# Altium PCB LoRaStm32.PcbDoc
Units mm, origin at the board's own origin, x right, y up, seen from the top; angles counter-clockwise.
Board outline 152.4 x 101.6 mm, 2 copper layers (Top Layer, Bottom Layer); 27 components, 29 nets, 134 pads, 19 vias.
Unrouted connection lines stored in the file: 31.
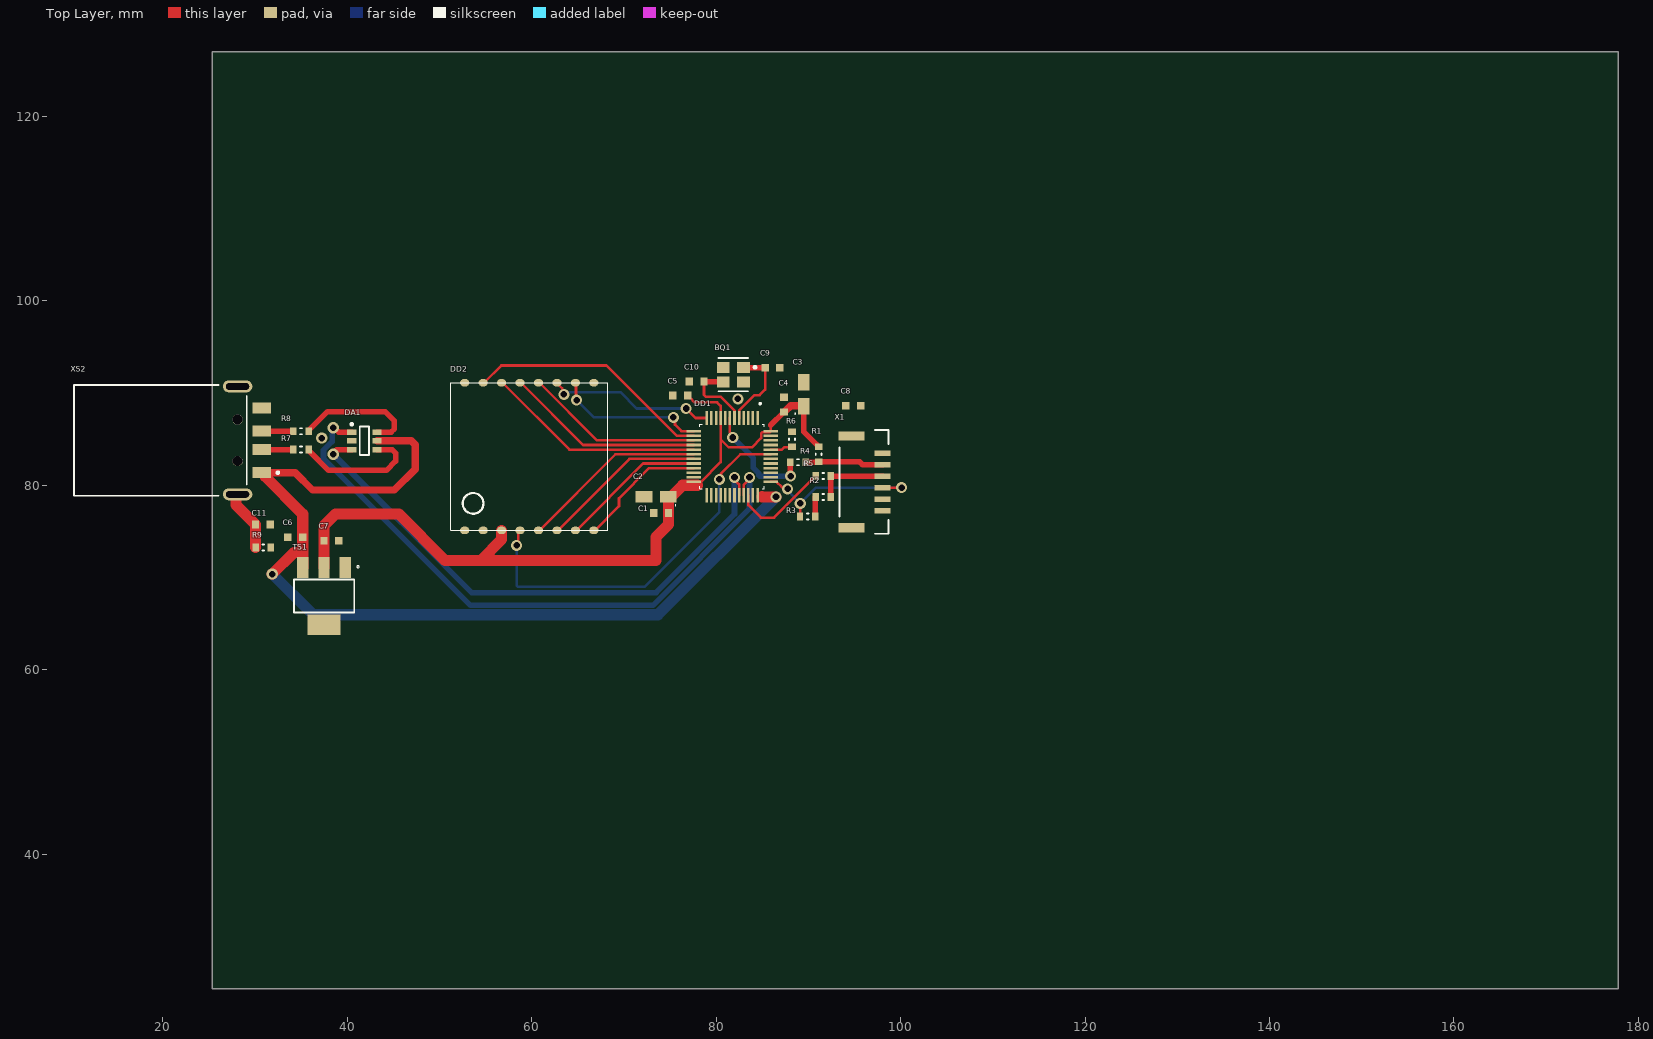
[diagram p0: Top Layer view]
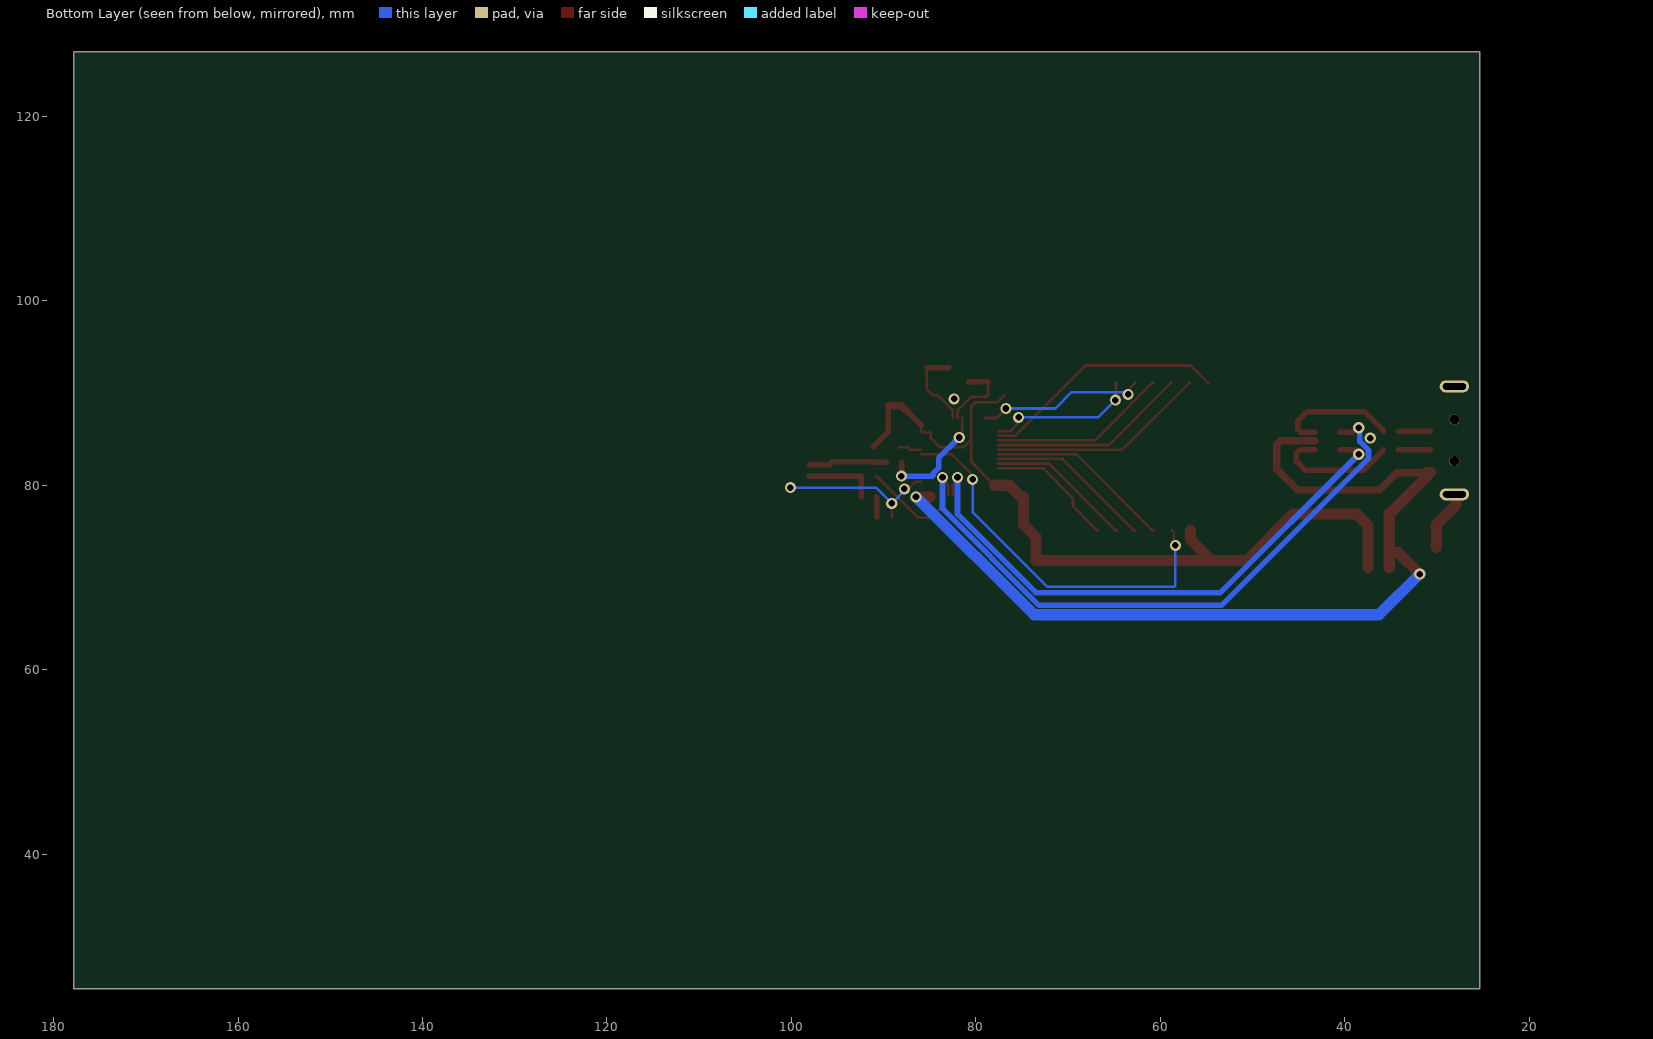
[diagram p1: Bottom Layer view, seen from below]
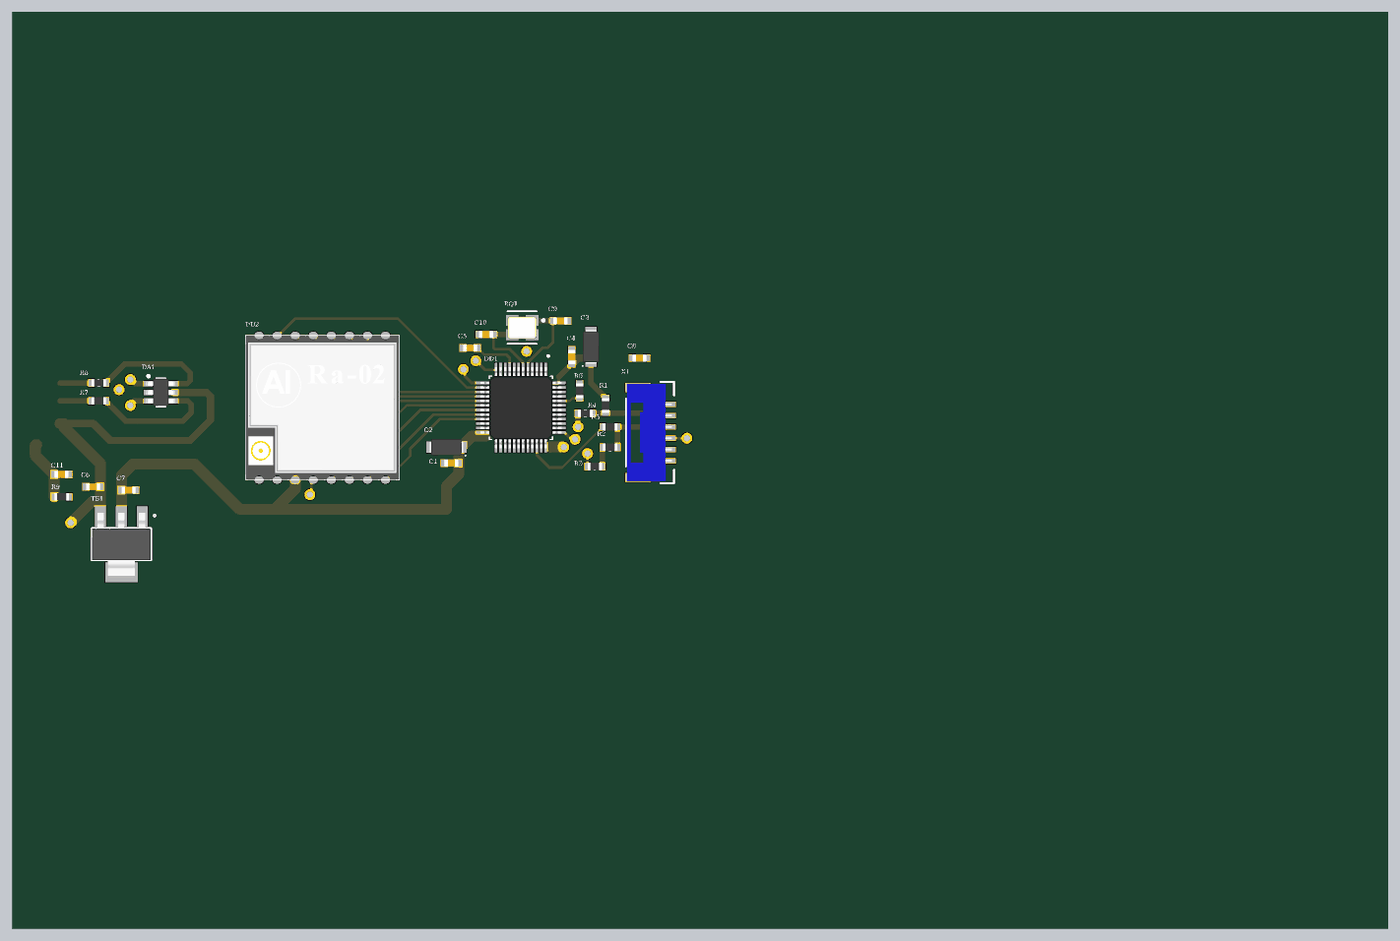
[diagram p2: 3D render of the assembled board from above, using the file's embedded part models]

## Layer stack, top to bottom
Top Solder: solder mask 0.0102, Solder Resist, Dk 3.5
Top Layer: signal copper 0.0356
Dielectric 1: dielectric 0.32, FR-4, Dk 4.8
Bottom Layer: signal copper 0.0356
Bottom Solder: solder mask 0.0102, Solder Resist, Dk 3.5

## Board outline
25.4,25.4 177.8,25.4 177.8,127 25.4,127

## Design rules (kind name [scope] priority, off if disabled: settings)
Clearance [All] p1: gap=0.125 ignorepadtopadclearanceinfootprint=FALSE
PolygonConnect [All] p1: connectstyle=Relief reliefconductorwidth=0.254 reliefentries=4 polygonreliefangle="90 Angle" airgapwidth=0.254
RoutingCorners [All] p1: cornerstyle=45-Degree minsetback=3 maxsetback=3
RoutingVias [All] p1: holewidth=0.3 width=0.7 viastyle="Through Hole" minholewidth=0.3 minwidth=0.6 maxholewidth=0.6 maxwidth=1.2
SolderMaskExpansion [All] p1: expansion=0.102
Width [All] p1: maxlimit=10 minlimit=0.125 preferedwidth=0.6
29 further rules are at their usual default settings.

## Components (designator, comment, footprint, x,y, rotation, side; value= is the part's Value field where it differs from the comment)
BQ1 "NX3225GA" NDK_NX3225GA_0 81.875,92 r180 top
C1 "*" CAPC1608X09L 74.046,77 r180 top
C2 "*" CAPMP3216X16N-A 73.5,78.75 r180 top value=1uF
C3 "*" CAPMP3216X16N-A 89.5,89.875 r90 top value=10uF
C4 "*" CAPC1608X09L 87.375,88.75 r90 top
C5 "*" CAPC1608X09L 76.125,89.75 r180 top
C6 "*" CAPC1608X09L 34.375,74.375 r180 top
C7 "*" CAPC1608X09L 38.3,74 r180 top
C8 "*" CAPC1608X09L 94.875,88.625 r0 top
C9 "*" CAPC1608X09L 86.125,92.75 r180 top
C10 "*" CAPC1608X09L 77.895,91.25 r0 top
C11 "*" CAPC1608X09L 30.875,75.75 r180 top value=4.7n
DA1 "USBLC6-2SC6" SOT95P280X145-6N 41.875,84.825 r0 top
DD1 "STM32L073CZT6" *QFP50P900X900X160-48N 81.75,83.125 r270 top
DD2 "RA-02 SX1278" RA-02 51.25,75.125 r90 top
R1 "R1608" RESC1608X05N 91.125,83.375 r270 top value=10k
R2 "R1608" RESC1608X05N 91.625,78.75 r0 top value=10k
R3 "R1608" RESC1608X05N 89.925,76.625 r180 top value=10k
R4 "R1608" RESC1608X05N 88.875,82.5 r0 top value=22
R5 "R1608" RESC1608X05N 91.625,81 r0 top value=22
R6 "R1608" RESC1608X05N 88.25,85 r270 top value=22
R7 "R1608" RESC1608X05N 35,83.875 r180 top value=22
R8 "R1608" RESC1608X05N 35,85.875 r180 top value=22
R9 "R1608" RESC1608X05N 30.9,73.25 r180 top value=22
TS1 "LD1117S33CTR" *SOT223 37.5,68 r270 top
X1 "BM06B-GHS-TBT(LF)(SN)(N)" BM06B-GH 96.375,80.375 r270 top
XS2 "Conn_Molex_0480372200_eec" Molex_0480372200_0 19.75,84.875 r270 top

## Footprints (in the part's own frame and the unit in brackets; to place one, negate y for a bottom-side part, rotate by r counter-clockwise, add the part's x,y. Pads: shape width x height; smd on the part's side, far side on the other; paste and mask are expansions set on the pad)
*QFP50P900X900X160-48N [mm]
  rect 1.56x0.28 smd: 1(-4.18,2.75) 2(-4.18,2.25) 3(-4.18,1.75) 4(-4.18,1.25) 5(-4.18,0.75) 6(-4.18,0.25) 7(-4.18,-0.25) 8(-4.18,-0.75) 9(-4.18,-1.25) 10(-4.18,-1.75) 11(-4.18,-2.25) 12(-4.18,-2.75) 25(4.18,-2.75) 26(4.18,-2.25) 27(4.18,-1.75) 28(4.18,-1.25) 29(4.18,-0.75) 30(4.18,-0.25) 31(4.18,0.25) 32(4.18,0.75) 33(4.18,1.25) 34(4.18,1.75) 35(4.18,2.25) 36(4.18,2.75)
  rect 0.28x1.56 smd: 13(-2.75,-4.18) 14(-2.25,-4.18) 15(-1.75,-4.18) 16(-1.25,-4.18) 17(-0.75,-4.18) 18(-0.25,-4.18) 19(0.25,-4.18) 20(0.75,-4.18) 21(1.25,-4.18) 22(1.75,-4.18) 23(2.25,-4.18) 24(2.75,-4.18) 37(2.75,4.18) 38(2.25,4.18) 39(1.75,4.18) 40(1.25,4.18) 41(0.75,4.18) 42(0.25,4.18) 43(-0.25,4.18) 44(-0.75,4.18) 45(-1.25,4.18) 46(-1.75,4.18) 47(-2.25,4.18) 48(-2.75,4.18)
  silkscreen extent -5.84,-3.5 3.5,3.5, body extent -4.5,-4.5 4.5,4.5, height 1.6
*SOT223 [mil]
  rect 88x48 smd: 1(-122,91) 2(-122,0) 3(-122,-91)
  rect 86.61x141.73 smd: 4(122.01,0)
  silkscreen extent -130,-129 70,150, body extent -138,-128 138,128, height 67
BM06B-GH [mm]
  rect 1x2.8 smd paste-0.05: 0(-4.975,-1.675) 0(4.975,-1.675)
  rect 0.6x1.7 smd paste-0.05: 1(-3.125,1.675) 2(-1.875,1.675) 3(-0.625,1.675) 4(0.625,1.675) 5(1.875,1.675) 6(3.125,1.675)
  silkscreen extent -5.63,-3 5.63,2.32, body extent -5.38,-2.87 5.37,2.08, height 4.18
CAPC1608X09L [mm] "Chip Capacitor, 2-Leads, Body 1.60x0.80mm, IPC High Density"
  rect 0.8x0.85 smd paste-0.05 mask+0.07: 1(-0.8,0) 2(0.8,0)
  body extent -0.8,-0.4 0.8,0.4, height 0.9
CAPMP3216X16N-A [mm] "Molded Capacitor, 2-Leads, Body 3.20x1.60mm, IPC Medium Density"
  rect 1.8x1.23 smd: 1(-1.31,0) 2(1.31,0)
  silkscreen extent -2.15,0.88 -2.05,0.97, body extent -1.92,-0.9 1.92,0.9, height 1.6
Molex_0480372200_0 [mm]
  rect 1.2x2 smd paste+0 mask+0: 1(3.5,10.975) 2(1,10.975) 3(-1,10.975) 4(-3.5,10.975)
  oval 1.3x3.2 hole 2.5 slot 0.7 at 0 deg paste-1000 mask+0: 5(-5.85,8.375) 6(5.85,8.375)
  round 1.1 hole 1.1 unplated paste-1000 mask+0: ""(-2.25,8.375) ""(2.25,8.375)
  silkscreen extent -6,-9.38 6,12.88, body extent -6.02,-9.32 6.03,11.63, height 2.11
NDK_NX3225GA_0 [mm]
  rect 1.4x1.2 smd paste+0 mask+0: 1(-1.1,-0.8) 2(1.1,-0.8) 3(1.1,0.8) 4(-1.1,0.8)
  silkscreen extent -2.48,-1.8 1.6,1.8, body extent -1.6,-1.25 1.6,1.25, height 0.6
RA-02 [mm]
  oval 0.8x1 smd: 1(0,-1.5) 2(0,-3.5) 3(0,-5.5) 4(0,-7.493) 5(0,-9.5) 6(0,-11.5) 7(0,-13.5) 8(0,-15.5) 9(16,-15.5) 10(16,-13.5) 11(16,-11.5) 12(16,-9.5) 13(16,-7.5) 14(16,-5.5) 15(16,-3.5) 16(16,-1.5)
  silkscreen extent 0,-17.02 16,0, body extent 0,-17.01 16,-0.01, height 3.2
RESC1608X05N [mm] "Chip Resistor, 2-Leads, Body 1.60x0.80mm, IPC Medium Density"
  rect 0.7x0.85 smd paste-0.05: 1(-0.825,0) 2(0.825,0)
  silkscreen extent -0.1,-0.33 0.1,0.33, body extent -0.8,-0.4 0.8,0.4, height 0.45
SOT95P280X145-6N [mm] "SOT23, 6-Leads, Body 2.92x2.80mm, Pitch 0.95mm, IPC Medium Density"
  rect 1x0.6 smd: 1(-1.375,0.95) 2(-1.375,0) 3(-1.375,-0.95) 4(1.375,-0.95) 5(1.375,0) 6(1.375,0.95)
  silkscreen extent -1.5,-1.55 0.5,1.92, body extent -1.6,-1.53 1.6,1.53, height 1.45

## Part data
BQ1: library part NX3225GA-25MHZ, "NX3225GA-25MHZ 8pF, 25 МГц, 30/20ppm, 8пФ, -40...+85°C, SMD 3.2*2.5*0.75мм, Кварцевый резонатор", Package="SMD-4 NDK America, Inc.", Availability=Unavailable, ComponentLink1Description=buy, ComponentLink1URL=https://www.chipdip.ru/product0/9000523947, ComponentLink2Description=datasheet, ComponentLink2URL=https://static.chipdip.ru/lib/014/DOC004014815.pdf, MF="NDK America, Inc.", MP="NX3225GA-25MHZ 8pF", Price=None, SnapEDA_Link=https://www.snapeda.com/parts/NX2520SA-24.000000MHZ-B8/NDK%20America%2C%20Inc./view-part/?ref=snap
C1 C4 C5 C6 C7 C8 C9 C10 C11: library part CC1608, "Конденсатор 1.6x0.8 мм", Tolerance=±10%, ТКЕ=X7R
  C1 C4 C5 C8: GRM21BR71C105KA01L=100nF, РКД Наименование="CC1608M - NP0 - 16 V - 10 nF ±10%"
  C6: GRM21BR71C105KA01L=100n, РКД Наименование="CC1608M - NP0 - 16 V - 10 nF ±10%"
  C7: GRM21BR71C105KA01L=10u, РКД Наименование="CC1608M - NP0 - 16 V - 10 nF ±10%"
  C9 C10: GRM1885C1H240JA01D=24pF, РКД Наименование="CC1608M - NP0 - 16 V - 10 nF ±10%"
  C11: РКД Наименование="CC1608M - NP0 - 16 V - 4.7 nF ±10%"
C2 C3: library part CT3216-A, "Tantalum Surface Mount Capacitor, Size A", Voltage=6.3V
DA1: "USB protection IC", Breakdown Voltage=6V, Capacitance=3.5pF, Case/Package=SOT-23, Clamping Voltage=17V, Leakage Current=150nA, Manufacturer=STMicroelectronics, Max Operating Temperature=125°C, Min Operating Temperature=-40°C, Operating Supply Voltage=1.1V, Package Quantity=3000, Peak Pulse Current=5A, Power Line Protection=Yes, Reverse Standoff Voltage=5.25V, Supplier Part Number 1=497-5235-1-ND, Test Current=1mA, Working Voltage=5V, ComponentLink1Description=http://www.farnell.com/datasheets/1690354.pdf, ComponentLink1URL=http://www.farnell.com/datasheets/1690354.pdf, ComponentLink2Description=http://www.st.com/content/ccc/resource/technical/document/datasheet/06/1d/48/9c/6c/20/4a/b2/CD00050750.pdf/files/CD00050750.pdf/jcr:content/translations/en.CD00050750.pdf, ComponentLink2URL=http://www.st.com/content/ccc/resource/technical/document/datasheet/06/1d/48/9c/6c/20/4a/b2/CD00050750.pdf/files/CD00050750.pdf/jcr:content/translations/en.CD00050750.pdf, ComponentLink3Description=http://www.st.com/web/en/resource/technical/document/datasheet/CD00050750.pdf, ComponentLink3URL=http://www.st.com/web/en/resource/technical/document/datasheet/CD00050750.pdf, ComponentLink4Description=http://datasheet.iiic.cc/stmicroelectronics/USBLC6-2SC6.pdf, ComponentLink4URL=http://datasheet.iiic.cc/stmicroelectronics/USBLC6-2SC6.pdf, ComponentLink5Description=http://www.produktinfo.conrad.com/datenblaetter/1100000-1199999/001184109-da-01-en-IC_ESD_PROTECTI_USBLC6_2SC6_SOT_23_6_STM.pdf, ComponentLink5URL=http://www.produktinfo.conrad.com/datenblaetter/1100000-1199999/001184109-da-01-en-IC_ESD_PROTECTI_USBLC6_2SC6_SOT_23_6_STM.pdf, Contact Plating=Matte,Tin, Data Rate=480Mbps, Depth=1.75mm, Direction=Bidirectional,Unidirectional, Element Configuration=Dual, ESD Protection=Yes, Height=1.3mm, Lead Free="Lead Free", Length=3.05mm, Manufacturer Part Number=USBLC6-2SC6, Max Breakdown Voltage=6V, Max Reverse Leakage Current=150nA, Min Breakdown Voltage=6V, Mount="Surface Mount", Number of Bidirectional Channels=2, Number of Channels=2, Number of Elements=1, Number of Pins=6, Packaging="Tape and Reel", PartNo=USBLC6-2SC6, Polarity=Bidirectional,Unidirectional, Pricing 1="1=0.49, 10=0.419, 100=0.3131, 500=0.24602, 1000=0.1901 (USD)", Radiation Hardening=No, REACH SVHC="No SVHC", Reverse Breakdown Voltage=6V, Stock 1=165611, Supplier 1=Digi-Key, Termination=SMD/SMT, Width=1.75mm
DD1: "ARM® Cortex®-M0+ STM32 L0 Microcontroller IC 32-Bit 32MHz 192KB _192K x 8_ FLASH 48-LQFP", Package="LQFP-48 STMicroelectronics", Digi-Key_Part_Number=497-17506-ND, Digi-Key_Purchase_URL=https://www.digikey.com/product-detail/en/stmicroelectronics/STM32L073CZT6/497-17506-ND/8024098?utm_source=snapeda&utm_medium=aggregator&utm_campaign=symbol, MF=STMicroelectronics, MP=STM32L073CZT6, SnapEDA_Link=https://www.snapeda.com/parts/STM32L073CZT6/STMicroelectronics/view-part/?ref=snap
DD2: library part RA-02
R1 R2 R3 R4 R5 R6 R7 R8 R9: "Резистор 1.6x0.8 мм", Tolerance=±1%, РКД Наименование="RC1608M - 22 Ohm ±1%"
TS1: "Linear Regulator / LDO Regulator Pos 3.3V 1.3A 4-Pin(3+Tab) SOT-223 T/R", Code_IPC=SOT-223, ComponentLink1Description=buy, ComponentLink1URL=https://www.chipdip.ru/product/ld1117s33ctr-2, ComponentLink2Description=datasheet, ComponentLink2URL=https://static.chipdip.ru/lib/292/DOC000292513.pdf, DatasheetVersion="revB, Feb-2007", PackageDescription="3-Lead Plastic Small Outline Transistor (TT) [SOT-23]", PackageReference=SOT-223, PackageVersion="revBB, Aug-2009", PartNumber=LD1117S33CTR
X1: library part "Разъем SWD", "SWD отладка", Colour=Natural, Contact Resistance=50mR, Housing Colour=Beige, Manufacturer=JST, Max Current Rating=1A, Max Operating Temperature=85°C, Max Voltage Rating (AC)=50V, Min Operating Temperature=-25°C, Supplier Part Number 1=455-1582-1-ND, ComponentLink1Description=http://www.jst-mfg.com/product/pdf/eng/eGH.pdf, ComponentLink1URL=http://www.jst-mfg.com/product/pdf/eng/eGH.pdf, Connector Type="Outer Shroud Contact", Contact Material=Bronze, Contact Plating=Copper,Tin, Depth=4.25mm, Fastening Type=Ramp, Housing Material=Polyamide, Lead Free="Lead Free", Length=10.75mm, Manufacturer Part Number=BM06B-GHS-TBT(LF)(SN)(N), Mount="Surface Mount", Number of Positions=6, Number of Rows=1, Orientation=Straight, Packaging="Tape and Reel", PartNo=BM06B-GHS-TBT(LF)(SN)(N), Pitch=0.049inch, Pricing 1="1=0.56, 10=0.524, 100=0.4019, 500=0.34948, 1000=0.28832 (USD)", Stock 1=44065, Supplier 1=Digi-Key, Termination=Solder
XS2: "CONN PLUG USB A 4POS SMD R/A", Current - Maximum per Contact=1.5A, Digikey Part Number=WM3983CT-ND, Manufacturer=Molex, Mouser Part Number=538-48037-2200, Package=CONN_USB_12MM0_18MM75, Part Number=0480372200, Temperature="-20°C to +85°C", Temperature Range High=+85°C, Temperature Range Low=-20°C, Voltage - Maximum="150V AC (RMS)", ComponentLink1Description=Upverter, ComponentLink1URL=https://upverter.com/upn/revision/6bade1e906f93a88/, ComponentLink2Description=Datasheet, ComponentLink2URL=http://www.molex.com/pdm_docs/sd/480372200_sd.pdf, Digikey Description="CONN PLUG USB A 4POS SMD R/A", helpURL=https://upverter.com/upn/revision/6bade1e906f93a88/, Is Female=yes, Lead Free=yes, Price=0.972849437621, RoHS=TRUE, Supplier 1=Digi-Key, Supplier 2=Mouser, Supplier Part Number 1=WM3983CT-ND, Supplier Part Number 2=538-48037-2200

## Via types
v1: diameter 1.2, hole 0.711, Top Layer to Bottom Layer, 19 vias

## Nets (pads, with @x,y where several pads share a name; then routed paths per layer and width w, separated by ;. In a path a pad name is that pad's centre, name@x,y a point inside that pad or via, vN(x,y) a via of type N, cw(c..) or ccw(c..) an arc to the next point about the centre after c; other vN are vias at no path point)
D+: DA1.1 DD1.33 | length 68.5
  Top Layer w0.28: DD1.33 83,80.058 83.625,80.683 v1(83.625,80.875)
  Top Layer w0.6: v1@38.75,86.25 38.75,86.126 39.101,85.775 DA1.1
  Bottom Layer w0.6: v1(38.5,86.25) 38.372,86.122 38.372,84.746 37.44,83.814 37.44,82.936 53.376,67 73.15,67 83.625,77.475 v1(83.625,80.875)
D-: DA1.3 DD1.32 | length 61.7
  Top Layer w0.28: v1(82,80.875) 82,80.607 82.5,80.107 DD1.32
  Top Layer w0.6: v1(38.5,83.375) 38.5,83.625 38.875,83.875 DA1.3
  Bottom Layer w0.6: v1(38.5,83.375) 53.5,68.375 73.5,68.375 82,76.875 v1(82,80.875)
GND: BQ1.2 BQ1.4 C1.2 C2.2 C3.2 C4.2 C5.2 C6.2 C7.1 C8.1 C9.1 C10.1 C11.1 DA1.2 DD1.8 DD1.23 DD1.35 DD1.47 DD2.1 DD2.2 DD2.9 DD2.16 R6.1 R9.1 TS1.1 X1.5 XS2.4
  other v1: 37.25,85.126 82.375,89.375
MISO: DD1.16 DD2.13 | length 21.6
  Top Layer w0.28: DD2.13 58.85,91.125 65.6,84.375 DD1.16
MOSI: DD1.17 DD2.14 | length 23.8
  Top Layer w0.28: DD2.14 56.85,91.125 64.1,83.875 DD1.17
NetBQ1_1: BQ1.1 C9.2 DD1.5 | length 9.3
  Top Layer w0.28: DD1.5 82.5,88.1 84.175,89.775 84.725,89.775 85.325,90.375 C9.2
  Top Layer w0.6: BQ1.1 83,92.775 85.3,92.775 C9.2
NetBQ1_3: BQ1.3 C10.2 DD1.6 | length 8.5
  Top Layer w0.28: C10.2 78.695,89.805 78.875,89.625 80.475,89.625 82,88.1 DD1.6 ; BQ1.3 BQ1.3@80.875,91.2
  Top Layer w0.6: C10.2 78.72,91.225 80.75,91.225 BQ1.3
NetC8_2: C8.2 DD1.7 R4.1 | length 12.2
  Top Layer w0.28: DD1.7 81.5,85.749 81.813,85.436 v1(81.813,85.188)
  Top Layer w0.6: v1@88.05,81.275 R4.1
  Bottom Layer w0.6: v1(81.813,85.188) 84.05,82.95 84.05,81.9 84.65,81.3 84.65,81.1 84.75,81 v1(88.075,81)
NetC11_2: C11.2 R9.2 XS2.5 XS2.6 | length 6.8
  Top Layer w1.2: XS2.6 28.006,79.025 27.96,78.979 27.96,77.865 C11.2 R9.2
NetDD1_18: DD1.18 DD2.5 | length 20.2
  Top Layer w0.28: DD2.5 60.85,75.125 69.1,83.375 DD1.18
NetDD1_19: DD1.19 DD2.6 | length 18
  Top Layer w0.28: DD2.6 62.85,75.125 70.6,82.875 DD1.19
NetDD1_20: DD1.20 DD2.7 | length 15.8
  Top Layer w0.28: DD2.7 64.85,75.125 72.1,82.375 DD1.20
NetDD1_21: DD1.21 DD2.8 | length 14.1
  Top Layer w0.28: DD2.8 66.85,75.125 69.475,77.75 69.475,78.6 72.75,81.875 DD1.21
NetDD1_34: DD1.34 R5.1 | length 10.8
  Top Layer w0.28: DD1.34 83.5,77.875 84.875,76.5 86.3,76.5 R5.1
NetDD1_37: DD1.37 R3.2 X1.4 | length 19.3
  Top Layer w0.28: DD1.37 86.57,80.375 87.144,79.801 87.575,79.801 v1(87.751,79.625) ; R3.2 89.125,76.65 v1@89.125,77.875 ; X1.4 v1(100.125,79.75)
  Bottom Layer w0.28: v1(87.751,79.625) 87.751,79.424 v1(89.125,78.05) 90.825,79.75 v1(100.125,79.75)
NetDD1_43: DD1.43 DD2.4 | length 42
  Top Layer w0.28: v1(58.375,73.5) 58.551,73.676 58.551,74.933 DD2.4 ; v1(80.36,80.652) 80.536,80.828 80.536,81.286 82.625,83.375 DD1.43
  Bottom Layer w0.28: v1(58.375,73.5) 58.375,69.164 58.539,69 72.235,69 80.36,77.125 v1(80.36,80.652)
NetDD1_44: DD1.44 R6.2 | length 2.4
  Top Layer w0.28: DD1.44 87.125,83.875 87.405,84.155 88.23,84.155 R6.2
NetR1_2: R1.2 R4.2 X1.2 | length 8.5
  Top Layer w0.6: R4.2 89.725,82.525 91.1,82.525 R1.2 95.575,82.55 95.875,82.25 X1.2
NetR2_2: R2.2 R5.2 X1.3 | length 7.9
  Top Layer w0.6: R2.2 R5.2 X1.3
NetR7_2: R7.2 XS2.2 | length 3.5
  Top Layer w0.6: XS2.2 R7.2
NetR8_2: R8.2 XS2.3 | length 3.5
  Top Layer w0.6: XS2.3 R8.2
NSS: DD1.14 DD2.15 | length 26.8
  Top Layer w0.28: DD2.15 54.85,91.125 56.725,93 68.125,93 75.75,85.375 DD1.14
PA2: DD1.12 DD2.11 | length 17.7
  Top Layer w0.28: DD2.11 62.75,91.084 63.324,90.51 63.324,90.051 v1(63.5,89.875) ; v1(76.75,88.335) 77.78,87.305 DD1.12
  Bottom Layer w0.28: v1@63.989,90.115 69.619,90.115 71.399,88.335 v1(76.75,88.335)
PA3: DD1.13 DD2.10 | length 16.4
  Top Layer w0.28: DD2.10 64.813,91.062 64.813,89.312 v1(64.875,89.25) ; v1(75.375,87.375) 75.551,87.199 75.551,86.574 76.25,85.875 DD1.13
  Bottom Layer w0.28: v1(64.875,89.25) 66.75,87.375 v1(75.375,87.375)
SCK: DD1.15 DD2.12 | length 19.4
  Top Layer w0.28: DD2.12 60.85,91.125 67.1,84.875 DD1.15
USB1_N: DA1.4 R7.1 | length 13.7
  Top Layer w0.6: R7.1 35.825,83.8 R7.1@35.875,83.75 ; R7.1@35.95,83.675 38,81.625 44.25,81.625 45.25,82.625 45.25,83.499 44.874,83.875 DA1.4
USB1_P: DA1.6 R8.1 | length 13.5
  Top Layer w0.6: R8.1 35.825,85.95 37.875,88 44.125,88 45.125,87 45.125,86.126 44.774,85.775 DA1.6
V3.3: C1.1 C2.1 C3.1 C4.1 C5.1 C7.2 DD1.9 DD1.24 DD1.48 DD2.3 R1.1 R2.1 R3.1 TS1.2 | length 91.6
  Top Layer w0.28: C5.1 76.925,89.725 77.185,89.465 77.21,89.465 77.675,89 80.125,89 80.5,88.625 DD1.9 80.5,85 ; DD1.24 78.365,80.375 80.5,82.51 80.5,85 ; 85.93,86.53 DD1.48 85.835,85.78 85.04,85.78 84.885,85.625 84.885,85.125 83.885,84.125 81.375,84.125 80.5,85 ; C4.1@87.35,87.95 C4.1
  Top Layer w0.6: C2.1@74.846,78.643 C2.1@74.952,78.75 ; 85.93,86.53 C4.1@87.35,87.95 ; C3.1@89.433,88.632 C3.1 89.5,85.825 91,84.325 91,84.25 91.05,84.2 R1.1 ; R3.1 90.75,78.7 R2.1
  Top Layer w0.8: C4.1 87.4,87.95 88.082,88.632 C3.1@89.433,88.632
  Top Layer w1.2: TS1.2@37.51,71.108 TS1.2 C7.2 37.5,75.625 38.75,76.875 45.625,76.875 50.625,71.875 54.5,71.875 ; DD2.3 56.75,74.125 54.5,71.875 ; C2.1 74.952,78.75 75.095,78.75 76.355,80.01 77.57,80.01 77.967,80.01 ; C2.1@74.846,78.643 C1.1 74.846,75.75 73.5,74.404 73.5,71.875 54.5,71.875
VBUS: C6.1 DA1.5 DD1.36 TS1.3 XS2.1 | length 104.9
  Top Layer w0.8: XS2.1@31.125,81.375 34.375,81.375 36.25,79.5 45.125,79.5 47.375,81.75 47.375,84.399 46.949,84.825 DA1.5
  Top Layer w1.2: XS2.1 31.125,81.375 31.125,80.975 35.189,76.911 35.189,74.389 C6.1 35.189,74.361 35.189,72.73 ; v1@31.875,70.375 v1(31.885,70.385) 34.23,72.73 35.189,72.73 ; TS1.3 35.189,72.73 ; 84.96,78.796 85.005,78.751 85.017,78.763 v1(86.5,78.763)
  Bottom Layer w1.2: v1(31.885,70.385) 36.295,65.975 73.712,65.975 v1(86.5,78.763)
pads on no net: DD1.1 DD1.2 DD1.3 DD1.4 DD1.10 DD1.11 DD1.22 DD1.25 DD1.26 DD1.27 DD1.28 DD1.29 DD1.30 DD1.31 DD1.38 DD1.39 DD1.40 DD1.41 DD1.42 DD1.45 DD1.46 TS1.4 X1.0 X1.1 X1.6 XS2.